# EAGLE board BoilerMakeBadge_I (EAGLE 7.0.0)

Size 213.36 x 213.36 mm. Coordinates in mm from the lower left corner, seen from the top.
Outline: circle at 106.68,106.68 radius 106.68
Copper layers (1*16): Top 0.035mm / dielectric 1.5mm / Bottom 0.035mm
Design rules "default": minimum track width 10mil, minimum drill 24mil, track to track 8mil, track to pad 8mil, pad to pad 8mil, via to via 8mil, smd to smd 8mil, copper to edge 40mil, drill to drill 8mil, minimum pad ring 10mil, minimum via ring 8mil, stop-mask expansion 4mil, vias tented up to drill 0mil, thermal gap 10mil

## Footprints (pad centres in the part's own frame; a part is rotated, then mirrored left to right if it is on the bottom)
EVQ-Q2 = smd 3.2 x 1.2: A -3.4,-2; A' 3.4,-2; B -3.4,2; B' 3.4,2
C0805K = smd 1.1 x 1.4: 1 -1,0; 2 1,0
A/3216-18R = smd 1.95 x 1.5: + 1.375,0; - -1.375,0
USB-MINIB = smd 0.5 x 2.308: D+ 0,4.064; D- -0.8,4.064; GND 1.6,4.064; ID 0.8,4.064; VBUS -1.6,4.064 | smd 2 x 2.4: GND1 -4.4,-2; GND2 -4.4,3.5; GND3 4.4,3.5; GND4 4.4,-2 | hole 0.9: -2.2,1; 2.2,1
TQFP44 = smd 1.5 x 0.5: 1 -5.8,4; 2 -5.8,3.2; 3 -5.8,2.4; 4 -5.8,1.6; 5 -5.8,0.8; 6 -5.8,0; 7 -5.8,-0.8; 8 -5.8,-1.6; 9 -5.8,-2.4; 10 -5.8,-3.2; 11 -5.8,-4; 23 5.8,-4; 24 5.8,-3.2; 25 5.8,-2.4; 26 5.8,-1.6; 27 5.8,-0.8; 28 5.8,0; 29 5.8,0.8; 30 5.8,1.6; 31 5.8,2.4; 32 5.8,3.2; 33 5.8,4 | smd 0.5 x 1.5: 12 -4,-5.8; 13 -3.2,-5.8; 14 -2.4,-5.8; 15 -1.6,-5.8; 16 -0.8,-5.8; 17 0,-5.8; 18 0.8,-5.8; 19 1.6,-5.8; 20 2.4,-5.8; 21 3.2,-5.8; 22 4,-5.8; 34 4,5.8; 35 3.2,5.8; 36 2.4,5.8; 37 1.6,5.8; 38 0.8,5.8; 39 0,5.8; 40 -0.8,5.8; 41 -1.6,5.8; 42 -2.4,5.8; 43 -3.2,5.8; 44 -4,5.8
ISP6 = drill 1.016 pad 1.778 octagon: 1 -2.54,-1.27; 2 -2.54,1.27; 3 0,-1.27; 4 0,1.27; 5 2.54,-1.27; 6 2.54,1.27
1X15-CB = drill 1.016 pad 1.778: 1 -17.78,0; 2 -15.24,0; 3 -12.7,0; 4 -10.16,0; 5 -7.62,0; 6 -5.08,0; 7 -2.54,0; 8 0,0; 9 2.54,0; 10 5.08,0; 11 7.62,0; 12 10.16,0; 13 12.7,0; 14 15.24,0; 15 17.78,0
CHIPLED_0805 = smd 1.2 x 1.2: A 0,-1.05; C 0,1.05
R1206 = smd 1.6 x 1.803: 1 -1.422,0; 2 1.422,0
R0805 = smd 1.1 x 1.4: 1 -1,0; 2 1,0
SJ = smd 1.168 x 1.6: 1 -0.762,0; 2 0.762,0
FIDUCIAL_1MM = smd 1 x 1: 1 0,0
NX5032 = smd 2 x 2.4: P$1 2,0; P$2 -2,0

## Placement (x,y rotation side)
BOOT  EVQQ2  [EVQ-Q2]  154.94,97.16 0 top
C1  0.1uF  [C0805K]  40.01,110.81 0 top
C2  18pF  [C0805K]  15.88,110.81 0 top
C3  18pF  [C0805K]  50.17,118.43 0 top
C4  0.1uF  [C0805K]  33.66,110.81 0 top
C5  10uF  [A/3216-18R]  34.93,104.46 0 top
C6  0.1uF  [C0805K]  27.31,110.81 0 top
C7  0.1uF  [C0805K]  20.96,110.81 0 top
CN1  MiniB USB  [USB-MINIB]  103.82,115.25 0 top
IC1  ATMEGA32U4-AU  [TQFP44]  106.68,82.23 0 top
ISP6  PINHD-2X3THM  [ISP6]  126.68,105.41 0 top
JP1  Breakout 1  [1X15-CB]  34.93,122.24 0 top
JP5  Breakout 2  [1X15-CB]  34.93,124.78 0 top
L  RED  [CHIPLED_0805]  46.36,110.81 0 top
L1  500mA  [R1206]  41.28,104.46 0 top
PWR  GREEN  [CHIPLED_0805]  110.17,125.73 0 top
R1  22  [R0805]  23.5,104.46 0 top
R2  22  [R0805]  18.42,104.46 0 top
R3  1K  [R0805]  86.04,89.22 0 top
R4  10K  [R0805]  28.58,104.46 0 top
R5  1K  [R0805]  51.44,112.08 0 top
SJ1  HWB  [SJ]  45.09,115.89 0 top
SJ2  VCC  [SJ]  40.01,115.89 0 top
U$1  FIDUCIAL  [FIDUCIAL_1MM]  36.2,115.89 0 top
U$2  FIDUCIAL  [FIDUCIAL_1MM]  33.66,115.89 0 top
U$6  FIDUCIAL  [FIDUCIAL_1MM]  31.12,115.89 0 top
X3  16MHz  [NX5032]  107,134.62 0 top

## Library data of the parts
BOOT IC1 ISP6 X3 = adaprog
C1-C7 CN1 JP1 JP5 L L1 PWR R1-R5 U$1 U$2 U$6 = adafruit
SJ1 SJ2 = jumper

## Nets
+3V3: C1.1 IC1.6 JP1.15
+5V: C4.1 C5.+ IC1.2 IC1.7 JP5.1 L1.2 R3.2 SJ2.2
AREF: IC1.42 JP5.2
GND: BOOT.B BOOT.B' C1.2 C2.2 C3.2 C4.2 C5.- C6.2 C7.2 CN1.GND IC1.5 IC1.15 IC1.23 IC1.35 IC1.43 ISP6.6 JP1.1 JP5.15 PWR.C R5.2 SJ1.2
HWB: IC1.33 R4.1 SJ1.1
MISO: IC1.11 ISP6.1 JP1.10
MOSI: IC1.10 ISP6.4 JP1.11
N$1: PWR.A R3.1
N$2: CN1.D+ R2.1
N$3: IC1.3 R1.2
N$4: IC1.4 R2.2
N$5: CN1.D- R1.1
N$8: C2.1 IC1.17 X3.P$2
N$9: C3.1 IC1.16 X3.P$1
N$10: L.C R5.1
PB0: IC1.8 JP1.13
PB4: IC1.28 JP5.14
PB5: IC1.29 JP5.13
PB6: IC1.30 JP5.12
PB7: IC1.12 JP5.11
PC6: IC1.31 JP5.10
PC7: IC1.32 JP5.9
PD0: IC1.18 JP1.9
PD1: IC1.19 JP1.8
PD2: IC1.20 JP1.7
PD3: IC1.21 JP1.6
PD4: IC1.25 JP1.5
PD5: IC1.22 JP1.4
PD6: IC1.26 JP1.3
PD7: IC1.27 JP1.2
PE6: IC1.1 JP1.14 L.A
PF0: IC1.41 JP5.3
PF1: IC1.40 JP5.4
PF4: IC1.39 JP5.5
PF5: IC1.38 JP5.6
PF6: IC1.37 JP5.7
PF7: IC1.36 JP5.8
RST: BOOT.A BOOT.A' IC1.13 ISP6.5
SCK: IC1.9 ISP6.3 JP1.12
VBUS: CN1.VBUS L1.1
VCC: C6.1 C7.1 IC1.14 IC1.24 IC1.34 IC1.44 ISP6.2 R4.2 SJ2.1

## Tracks (layer width: path | path; a pad name or v marks a point on that pad's centre or on a via)
+3V3  (2 unrouted)
+5V  (7 unrouted)
AREF  (1 unrouted)
GND  (20 unrouted)
HWB  (2 unrouted)
MISO  (2 unrouted)
MOSI  (2 unrouted)
N$1  (1 unrouted)
N$2  (1 unrouted)
N$3  (1 unrouted)
N$4  (1 unrouted)
N$5  (1 unrouted)
N$8  (2 unrouted)
N$9  (2 unrouted)
N$10  (1 unrouted)
PB0  (1 unrouted)
PB4  (1 unrouted)
PB5  (1 unrouted)
PB6  (1 unrouted)
PB7  (1 unrouted)
PC6  (1 unrouted)
PC7  (1 unrouted)
PD0  (1 unrouted)
PD1  (1 unrouted)
PD2  (1 unrouted)
PD3  (1 unrouted)
PD4  (1 unrouted)
PD5  (1 unrouted)
PD6  (1 unrouted)
PD7  (1 unrouted)
PE6  (2 unrouted)
PF0  (1 unrouted)
PF1  (1 unrouted)
PF4  (1 unrouted)
PF5  (1 unrouted)
PF6  (1 unrouted)
PF7  (1 unrouted)
RST  (3 unrouted)
SCK  (2 unrouted)
VBUS  (1 unrouted)
VCC  (8 unrouted)